# EAGLE board NEW IR (EAGLE 9.6.2)
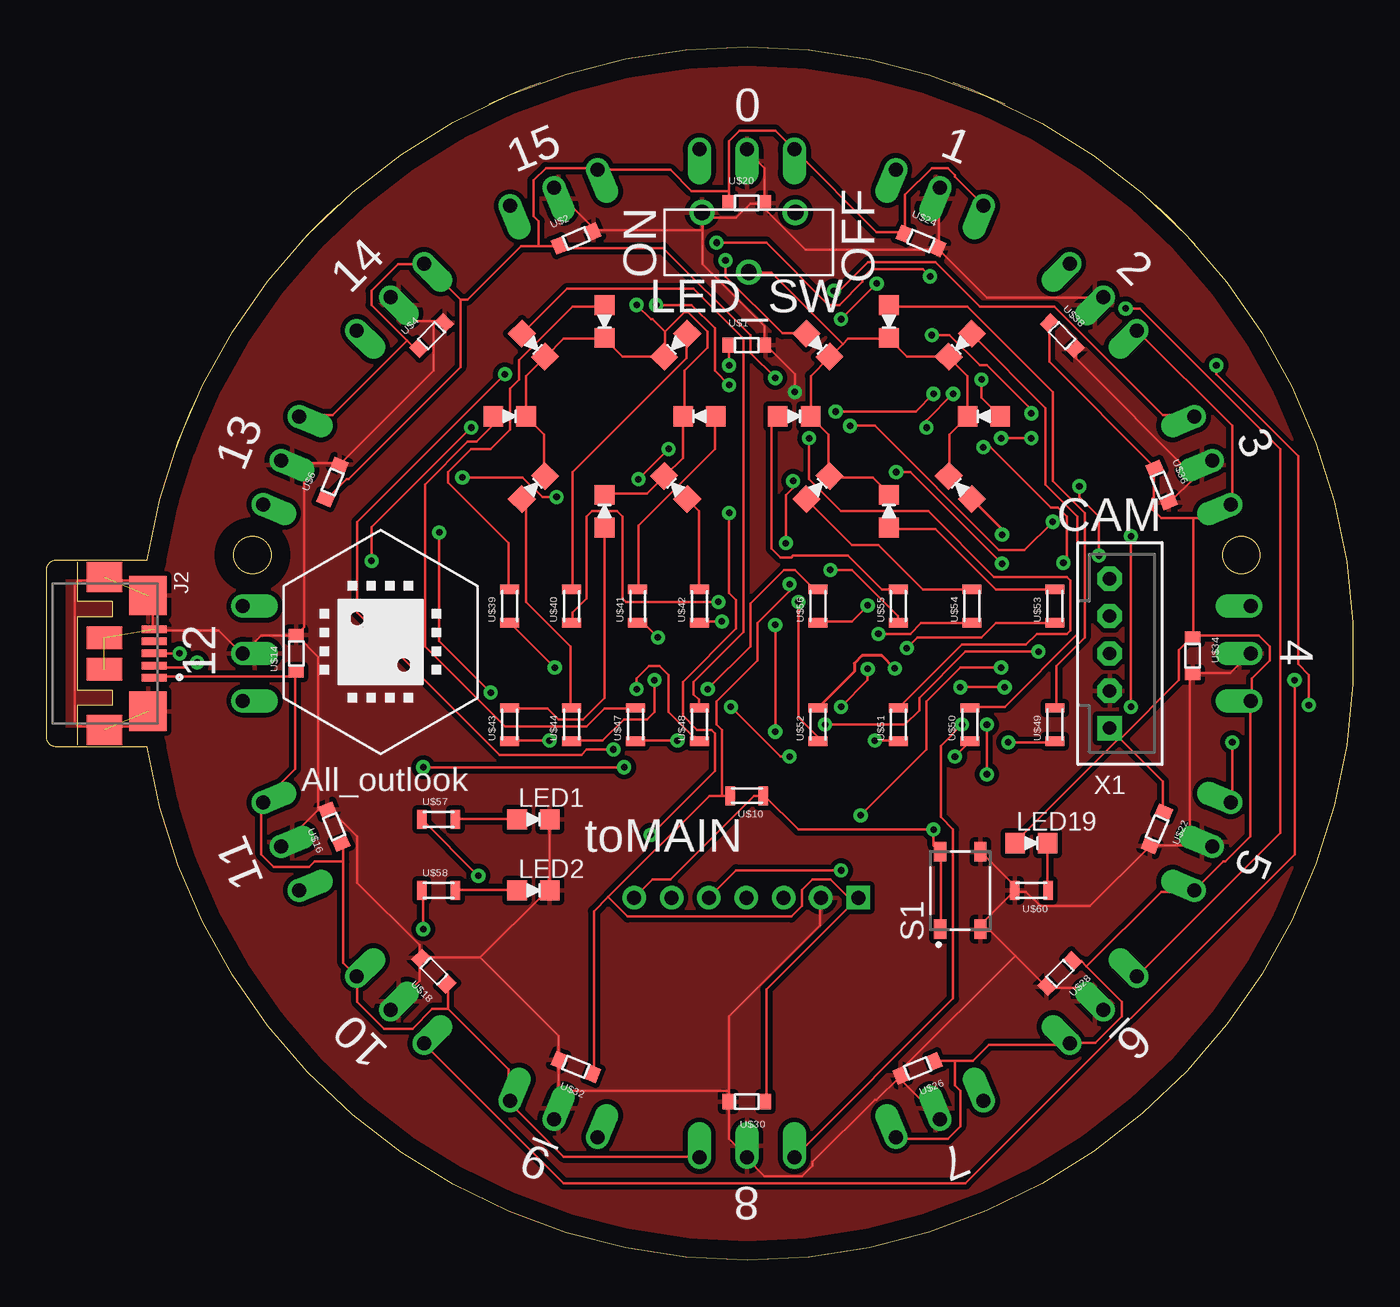
[diagram p0: board, top side]
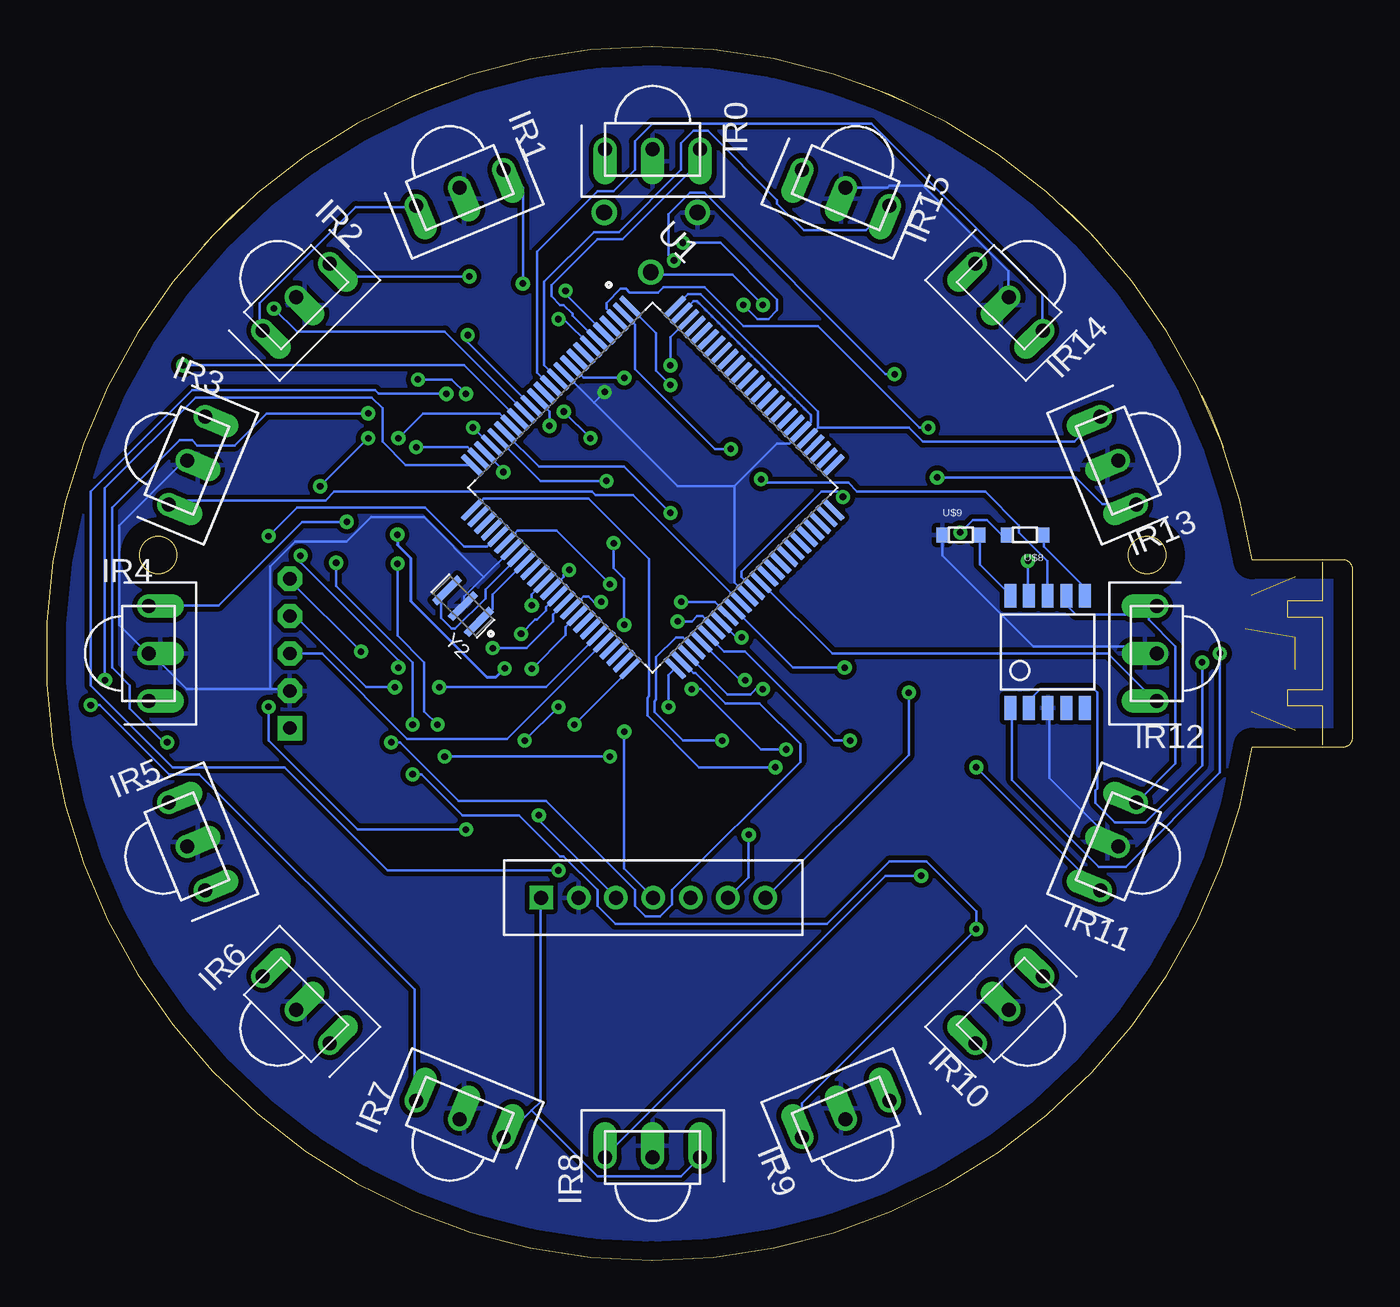
[diagram p1: board, bottom side, seen from below]

Size 69.96 x 65 mm. Coordinates in mm from the lower left corner, seen from the top.
Outline: 61.52,54.4 arc5 59.4,56.52
Outline: 51.31,61.92 arc5 48.54,63.07
Outline: 26.46,63.07 arc5 23.69,61.92
Outline: 15.6,56.52 arc5 13.48,54.4
Outline: 8.08,46.31 arc5 6.93,43.54
Outline: 5.39,37.5 arc-342 5.39,27.5 0.5,27.5 arc-90 0,28 0,37 arc-90 0.5,37.5 5.39,37.5
Outline: circle at 11.02,37.77 radius 1
Outline: circle at 63.98,37.77 radius 1
Copper layers (1*16): Top 0.035mm / dielectric 1.5mm / Bottom 0.035mm
Design rules "default *": minimum track width 5mil, minimum drill 0.35mm, track to track 8mil, track to pad 8mil, pad to pad 8mil, via to via 8mil, smd to smd 1mil, copper to edge 40mil, drill to drill 6mil, minimum pad ring 10mil, minimum via ring 8mil, stop-mask expansion 4mil, vias tented up to drill 0mil, thermal gap 10mil
Net classes: 0 default: width 0.127 mm, clearance 0.254 mm

## Footprints (pad centres in the part's own frame; a part is rotated, then mirrored left to right if it is on the bottom)
IR = drill 0.75 offset: P$1 -2.54,0; P$2 0,0; P$3 2.54,0
HRS_ZX62R-B-5P = smd 0.4 x 1.35: 1 1.3,2.675; 2 0.65,2.675; 3 0,2.675; 4 -0.65,2.675; 5 -1.3,2.675 | smd 2.1 x 2: S1 -3.1,2.35; S2 3.1,2.35 | smd 1.6 x 1.9: S3 -4.1,0; S4 4.1,0 | smd 1.2 x 1.9: S5 -0.85,0; S6 0.85,0
LED1608 = smd 1.05 x 1.08: A -0.875,0; K 0.875,0
SW_SKRPACE010 = smd 1.05 x 0.65: 1 -2.075,1.075; 2 2.075,1.075; 3 -2.075,-1.075; 4 2.075,-1.075
QFP50P1600X1600X120-100N = smd 1.47 x 0.28: 1 -7.67,6; 2 -7.67,5.5; 3 -7.67,5; 4 -7.67,4.5; 5 -7.67,4; 6 -7.67,3.5; 7 -7.67,3; 8 -7.67,2.5; 9 -7.67,2; 10 -7.67,1.5; 11 -7.67,1; 12 -7.67,0.5; 13 -7.67,0; 14 -7.67,-0.5; 15 -7.67,-1; 16 -7.67,-1.5; 17 -7.67,-2; 18 -7.67,-2.5; 19 -7.67,-3; 20 -7.67,-3.5; 21 -7.67,-4; 22 -7.67,-4.5; 23 -7.67,-5; 24 -7.67,-5.5; 25 -7.67,-6; 51 7.67,-6; 52 7.67,-5.5; 53 7.67,-5; 54 7.67,-4.5; 55 7.67,-4; 56 7.67,-3.5; 57 7.67,-3; 58 7.67,-2.5; 59 7.67,-2; 60 7.67,-1.5; 61 7.67,-1; 62 7.67,-0.5; 63 7.67,0; 64 7.67,0.5; 65 7.67,1; 66 7.67,1.5; 67 7.67,2; 68 7.67,2.5; 69 7.67,3; 70 7.67,3.5; 71 7.67,4; 72 7.67,4.5; 73 7.67,5; 74 7.67,5.5; 75 7.67,6 | smd 0.28 x 1.47: 26 -6,-7.67; 27 -5.5,-7.67; 28 -5,-7.67; 29 -4.5,-7.67; 30 -4,-7.67; 31 -3.5,-7.67; 32 -3,-7.67; 33 -2.5,-7.67; 34 -2,-7.67; 35 -1.5,-7.67; 36 -1,-7.67; 37 -0.5,-7.67; 38 0,-7.67; 39 0.5,-7.67; 40 1,-7.67; 41 1.5,-7.67; 42 2,-7.67; 43 2.5,-7.67; 44 3,-7.67; 45 3.5,-7.67; 46 4,-7.67; 47 4.5,-7.67; 48 5,-7.67; 49 5.5,-7.67; 50 6,-7.67; 76 6,7.67; 77 5.5,7.67; 78 5,7.67; 79 4.5,7.67; 80 4,7.67; 81 3.5,7.67; 82 3,7.67; 83 2.5,7.67; 84 2,7.67; 85 1.5,7.67; 86 1,7.67; 87 0.5,7.67; 88 0,7.67; 89 -0.5,7.67; 90 -1,7.67; 91 -1.5,7.67; 92 -2,7.67; 93 -2.5,7.67; 94 -3,7.67; 95 -3.5,7.67; 96 -4,7.67; 97 -4.5,7.67; 98 -5,7.67; 99 -5.5,7.67; 100 -6,7.67
CON = smd 0.6 x 0.813: P$1 -1,0; P$2 1,0
SSW = drill 0.85: P$1 -2.5,1.6; P$2 2.5,1.6; P$3 0,-1.6
CH340K = smd 0.635 x 1.27: P$1 0.5,-1; P$2 1.5,-1; P$3 2.5,-1; P$4 3.5,-1; P$5 4.5,-1; P$6 4.5,5; P$7 3.5,5; P$8 2.5,5; P$9 1.5,5; P$10 0.5,5
1608 = smd 0.508 x 1.016: P$1 -0.889,0; P$2 0.889,0
SPI = drill 0.75 square: P$1 0,0 | drill 0.75: P$2 2,0; P$3 4,0; P$4 6,0; P$5 8,0; P$6 10,0; P$7 12,0
B5B-PH-K-S = drill 0.7 pad 1.3 square: 1 4,0 | drill 0.7 pad 1.3 octagon: 2 2,0; 3 0,0; 4 -2,0; 5 -4,0
OSC_CSTCE16M0V53-R0 = smd 0.4 x 1.9: 1 -1.2,0; 2 0,0; 3 1.2,0

## Placement (x,y rotation side)
IR0  IR  [IR]  37.5,59.5 180 bottom
IR1  IR  [IR]  47.83,57.44 202.5 bottom
IR2  IR  [IR]  56.59,51.59 225 bottom
IR3  IR  [IR]  62.44,42.83 247.5 bottom
IR4  IR  [IR]  64.5,32.5 270 bottom
IR5  IR  [IR]  62.44,22.17 292.5 bottom
IR6  IR  [IR]  56.59,13.41 315 bottom
IR7  IR  [IR]  47.83,7.55 337.5 bottom
IR8  IR  [IR]  37.5,5.5 0 bottom
IR9  IR  [IR]  27.17,7.55 22.5 bottom
IR10  IR  [IR]  18.41,13.41 45 bottom
IR11  IR  [IR]  12.56,22.17 67.5 bottom
IR12  IR  [IR]  10.5,32.5 90 bottom
IR13  IR  [IR]  12.56,42.83 112.5 bottom
IR14  IR  [IR]  18.41,51.59 135 bottom
IR15  IR  [IR]  27.17,57.44 157.5 bottom
J2  ZX62R-B-5P  [HRS_ZX62R-B-5P]  3.08,32.5 270 top
LED1  LED1608  [LED1608]  26.07,23.61 0 top
LED2  LED1608  [LED1608]  26.07,19.8 0 top
LED3  LED1608  [LED1608]  29.88,50.28 270 top
LED4  LED1608  [LED1608]  33.69,49.01 225 top
LED5  LED1608  [LED1608]  34.96,45.2 180 top
LED6  LED1608  [LED1608]  33.69,41.39 135 top
LED7  LED1608  [LED1608]  29.88,40.12 90 top
LED8  LED1608  [LED1608]  26.07,41.39 45 top
LED9  LED1608  [LED1608]  24.8,45.2 0 top
LED10  LED1608  [LED1608]  26.07,49.01 315 top
LED11  LED1608  [LED1608]  45.12,50.28 270 top
LED12  LED1608  [LED1608]  48.93,49.01 225 top
LED13  LED1608  [LED1608]  50.2,45.2 180 top
LED14  LED1608  [LED1608]  48.93,41.39 135 top
LED15  LED1608  [LED1608]  45.12,40.12 90 top
LED16  LED1608  [LED1608]  41.31,41.39 45 top
LED17  LED1608  [LED1608]  40.04,45.2 0 top
LED18  LED1608  [LED1608]  41.31,49.01 315 top
LED19  LED1608  [LED1608]  52.74,22.34 0 top
S1  SKRPACE010  [SW_SKRPACE010]  48.93,19.8 90 top
U1  ATMEGA2560-16AU  [QFP50P1600X1600X120-100N]  37.5,41.39 315 bottom
U$1  1608  [CON]  37.5,49.01 0 top
U$2  1608  [CON]  28.36,54.72 22.5 top
U$3  ALL  [ALL]  17.88,33.12 0 top
U$4  1608  [CON]  20.61,49.52 45 top
U$5  SSW  [SSW]  37.6,54.52 0 top
U$6  1608  [CON]  15.31,41.68 67.5 top
U$7  CH340K  [CH340K]  18.84,30.58 0 bottom
U$8  1608  [CON]  17.56,38.85 180 bottom
U$9  1608  [CON]  20.99,38.85 0 bottom
U$10  R  [1608]  37.5,24.88 180 top
U$14  1608  [CON]  13.37,32.5 90 top
U$16  1608  [CON]  15.4,23.23 112.5 top
U$18  1608  [CON]  20.74,15.48 135 top
U$20  1608  [CON]  37.5,56.63 0 top
U$22  1608  [CON]  59.47,23.1 247.5 top
U$24  1608  [CON]  46.82,54.6 337.5 top
U$26  1608  [CON]  46.64,10.27 202.5 top
U$28  1608  [CON]  54.26,15.35 225 top
U$30  1608  [CON]  37.5,8.5 180 top
U$32  1608  [CON]  28.35,10.35 157.5 top
U$34  1608  [CON]  61.38,32.37 270 top
U$36  1608  [CON]  59.73,41.52 292.5 top
U$38  1608  [CON]  54.39,49.52 315 top
U$39  R  [1608]  24.8,35.04 90 top
U$40  R  [1608]  28.1,35.04 90 top
U$41  R  [1608]  31.66,35.04 90 top
U$42  R  [1608]  34.96,35.04 90 top
U$43  R  [1608]  24.8,28.69 90 top
U$44  R  [1608]  28.1,28.69 90 top
U$47  R  [1608]  31.53,28.69 90 top
U$48  R  [1608]  34.96,28.69 90 top
U$49  R  [1608]  54.01,28.69 90 top
U$50  R  [1608]  49.44,28.69 90 top
U$51  R  [1608]  45.63,28.69 90 top
U$52  R  [1608]  41.31,28.69 90 top
U$53  R  [1608]  54.01,35.04 90 top
U$54  R  [1608]  49.56,35.04 90 top
U$55  R  [1608]  45.63,35.04 90 top
U$56  R  [1608]  41.31,35.04 90 top
U$57  R  [1608]  20.99,23.61 0 top
U$58  R  [1608]  20.99,19.8 0 top
U$59  SPI  [SPI]  43.47,19.42 0 bottom
U$60  R  [1608]  52.74,19.8 180 top
X1  B5B-PH-K-S  [B5B-PH-K-S]  56.93,32.5 270 top
Y2  CSTCE16M0V53-R0  [OSC_CSTCE16M0V53-R0]  47.66,35.04 135 bottom

## Library data of the parts
IR0 IR1-IR15 = IR
J2 = USBMicro; AVAILABILITY: In Stock; DESCRIPTION: USB - micro B USB 2.0 Receptacle Connector 5 Position Surface Mount, Right Angle; MF: Hirose; MP: ZX62R-B-5P; PACKAGE: None; PRICE: None
LED1-LED19 = generic
S1 = SKRPACE010; AVAILABILITY: In Stock; DESCRIPTION: Switch Tactile N.O. SPST Button J-Bend 0.05A 16VDC 2.55N SMD Automotive T/R; MF: ALPS; MP: SKRPACE010; PACKAGE: None; PRICE: None
U1 = ATMEGA2560-16AU (1); AVAILABILITY: In Stock; DESCRIPTION: AVR AVR® ATmega Microcontroller IC 8-Bit 16MHz 256KB (128K x 16) FLASH 100-TQFP (14x14); MF: Microchip Technology; MP: ATMEGA2560-16AU; PACKAGE: None; PRICE: None; PURCHASE-URL: https://pricing.snapeda.com/search/part/ATMEGA2560-16AU/?ref=eda
U$1 U$2 U$4 U$6 U$8 U$9 U$14 U$16 U$18 U$20 U$22 U$24 U$26 U$28 U$30 U$32 U$34 U$36 U$38 = con1608
U$3 = All_outlook
U$5 = SSW
U$7 = CH340K
U$10 U$39-U$44 U$47-U$58 U$60 = R 1608
U$59 = SPI用PH7ピン
X1 = con-JST PH
Y2 = CSTCE16M0V53-R0; MANUFACTURER: Murata; MAXIMUM_PACKAGE_HEIGHT: 1.00mm; PARTREV: May 7, 2019; STANDARD: Manufacturer Recommendations

## Nets
+5V: IR0.P$3 IR1.P$3 IR2.P$3 IR3.P$3 IR4.P$3 IR5.P$3 IR6.P$3 IR7.P$3 IR8.P$3 IR9.P$3 IR10.P$3 IR11.P$3 IR12.P$3 IR13.P$3 IR14.P$3 IR15.P$3 J2.1 LED19.A U1.10 U1.31 U1.61 U1.80 U1.100 U$2.P$1 U$4.P$1 U$6.P$1 U$7.P$7 U$10.P$2 U$14.P$1 U$16.P$1 U$18.P$1 U$20.P$1 U$22.P$1 U$24.P$1 U$26.P$1 U$28.P$1 U$30.P$1 U$32.P$1 U$34.P$1 U$36.P$1 U$38.P$1 U$59.P$1 X1.1
A0: U1.97
A1: U1.96
A2: U1.95
A3: U1.94
A4: U1.93
A5: U1.92
A6: U1.91
A7: U1.90
A8: U1.89
A9: U1.88
A10: U1.87
A11: U1.86
A12: U1.85
A13: U1.84
A14: U1.83
A15: U1.82
D2: IR0.P$1 U1.6
D3: IR1.P$1 U1.7
D4: IR2.P$1 U1.1
D5: IR3.P$1 U1.5
D6: IR4.P$1 U1.15
D7: IR5.P$1 U1.16
D8: IR6.P$1 U1.17
D9: IR7.P$1 U1.18
D10: IR8.P$1 U1.23 U$57.P$1
D11: IR9.P$1 U1.24 U$58.P$1
D12: IR10.P$1 U1.25
D13: IR11.P$1 U1.26
D14: IR12.P$1 U1.64
D15: IR13.P$1 U1.63
D16: IR14.P$1 U1.13
D17: IR15.P$1 U1.12
D22: U1.78
D23: U1.77
D24: U1.76
D25: U1.75
D26: U1.74
D27: U1.73
D28: U1.72
D29: U1.71
D30: U1.60 U$39.P$1
D31: U1.59 U$40.P$1
D32: U1.58 U$41.P$1
D33: U1.57 U$42.P$1
D34: U1.56 U$43.P$1
D35: U1.55 U$44.P$1
D36: U1.54 U$47.P$1
D37: U1.53 U$48.P$1
D39: U1.70
D40: U1.52 U$49.P$1
D41: U1.51 U$50.P$1
D42: U1.42 U$51.P$1
D43: U1.41 U$52.P$1
D44: U1.40 U$53.P$1
D45: U1.39 U$54.P$1
D46: U1.38 U$55.P$1
D47: U1.37 U$56.P$1
D48: U1.36
D49: U1.35
GND: IR0.P$2 IR1.P$2 IR2.P$2 IR3.P$2 IR4.P$2 IR5.P$2 IR6.P$2 IR7.P$2 IR8.P$2 IR9.P$2 IR10.P$2 IR11.P$2 IR12.P$2 IR13.P$2 IR14.P$2 IR15.P$2 J2.5 J2.S1 J2.S2 J2.S3 J2.S4 J2.S5 J2.S6 LED1.K LED2.K S1.3 S1.4 U1.11 U1.32 U1.62 U1.81 U1.99 U$1.P$2 U$2.P$2 U$4.P$2 U$5.P$1 U$6.P$2 U$7.P$3 U$9.P$1 U$14.P$2 U$16.P$2 U$18.P$2 U$20.P$2 U$22.P$2 U$24.P$2 U$26.P$2 U$28.P$2 U$30.P$2 U$32.P$2 U$34.P$2 U$36.P$2 U$38.P$2 U$59.P$2 U$60.P$2 X1.2 Y2.2
MISO: U1.22 U$59.P$5
MOSI: U1.21 U$59.P$4
N$1: LED3.A U$39.P$2
N$2: LED4.A U$40.P$2
N$3: LED5.A U$41.P$2
N$4: LED6.A U$42.P$2
N$5: LED7.A U$43.P$2
N$6: LED8.A U$44.P$2
N$7: LED9.A U$47.P$2
N$9: LED2.A U$58.P$2
N$10: LED1.A U$57.P$2
N$11: LED3.K LED4.K LED5.K LED6.K LED7.K LED8.K LED9.K LED10.K LED11.K LED12.K LED13.K LED14.K LED15.K LED16.K LED17.K LED18.K U$5.P$3
N$12: U$7.P$6 U$8.P$1
N$16: J2.2 U$7.P$2
N$17: J2.3 U$7.P$1
N$18: U$7.P$10 U$9.P$2
N$22: LED10.A U$48.P$2
N$24: LED11.A U$49.P$2
N$25: LED12.A U$50.P$2
N$26: LED13.A U$51.P$2
N$27: LED14.A U$52.P$2
N$28: LED15.A U$53.P$2
N$29: LED16.A U$54.P$2
N$30: LED17.A U$55.P$2
N$31: LED18.A U$56.P$2
N$37: LED19.K U$60.P$1
N$46: U1.98 U$1.P$1
RES: S1.1 S1.2 U1.30 U$8.P$2 U$10.P$1 U$59.P$7
RST: U1.50 X1.5
RX0: U1.2 U$7.P$8
RX1: U1.45 X1.4
SCK [New Class]: U1.20 U$59.P$6
SCL: U1.43
SDA: U1.44
SS: U1.19 U$59.P$3
TX0: U1.3 U$7.P$9
TX1: U1.46 X1.3
XT1: U1.34 Y2.1
XT2: U1.33 Y2.3

## Tracks (layer width: path | path; a pad name or v marks a point on that pad's centre or on a via)
+5V  (via drill 0.35)
  Top 0.127: 30.07,19.45 35.5,24.88 36.17,24.88 | 30.07,19.45 29.31,18.69 29.31,10.02 U$32.P$1 | U$10.P$2 36.17,24.88 | v39.79,36.21 39.79,35.83 38.07,34.12 38.07,32.12 35.88,29.93 35.88,28.69 36.17,28.4 36.17,24.88 | 43.22,19.16 U$59.P$1 43.41,19.35 | 43.22,19.16 38.55,14.5 38.55,8.5 U$30.P$1 | 48.64,10.69 49.6,10.69 50.45,11.54 54.74,11.54 IR6.P$3 54.84,11.64 56.17,11.64 57.6,13.07 57.6,13.83 55.69,15.74 | 48.64,10.69 47.6,10.69 U$26.P$1 | 55.69,15.74 55.41,16.02 55.03,16.02 U$28.P$1 | 48.64,10.69 48.64,9.35 48.93,9.07 48.93,7.16 48.26,6.5 45.5,6.5 IR7.P$3 | 55.69,15.74 59.69,19.74 61.41,19.74 IR5.P$3 61.5,19.83 63.03,21.36 63.12,21.36 64.46,22.69 64.46,29.93 IR4.P$3 64.55,30.02 64.55,31.17 65.5,32.12 65.5,32.88 64.93,33.45 61.41,33.45 | 13.31,31.26 13.31,26.31 11.59,24.59 IR11.P$3 11.5,24.5 11.5,21.74 12.16,21.07 14.07,21.07 14.35,21.36 15.88,21.36 | 13.31,31.26 13.31,31.45 U$14.P$1 13.31,31.26 | 13.31,31.26 5.78,31.26 J2.1 | 15.88,21.36 15.88,15.93 16.55,15.26 IR10.P$3 16.64,15.16 16.64,13.83 18.07,12.4 19.59,12.4 20.64,13.45 21.5,13.45 | 15.88,21.36 15.88,22.21 U$16.P$1 | 21.5,13.45 21.5,14.69 U$18.P$1 | 21.5,13.45 24.74,10.21 24.74,8.59 IR9.P$3 24.74,8.5 27.69,5.54 34.93,5.54 IR8.P$3 | 30.07,19.45 31.12,18.4 39.88,18.4 40.45,18.97 40.45,19.83 41.02,20.4 41.98,20.4 43.22,19.16 | 36.55,57.26 36.55,59.93 37.12,60.5 39.02,60.5 39.98,59.55 IR0.P$3 40.07,59.46 44.45,55.07 45.88,55.07 U$24.P$1 45.98,55.07 45.98,57.07 47.41,58.5 48.26,58.5 48.64,58.12 48.64,58.03 50.17,56.5 IR1.P$3 | 36.55,57.26 36.55,56.69 U$20.P$1 | 36.55,57.26 34.55,57.26 33.4,58.41 29.59,58.41 IR15.P$3 29.5,58.5 26.74,58.5 26.07,57.84 26.07,55.93 26.36,55.65 26.36,54.31
  Top 0.127: 22.16,51.45 22.16,47.83 16.16,41.83 16.07,41.83 15.02,40.79 U$6.P$1 | 22.16,51.45 20.26,53.36 IR14.P$3 20.16,53.36 18.83,53.36 17.4,51.93 17.4,51.17 19.31,49.26 | 19.31,49.26 19.69,48.88 19.88,48.88 U$4.P$1 | 26.36,54.31 25.4,54.31 22.55,51.45 22.16,51.45 | 26.36,54.31 27.4,54.31 U$2.P$1 27.5,54.31 27.59,54.22 33.02,54.22 37.69,49.55 37.69,48.6 v39.02,47.26 | 19.31,49.26 15.31,45.26 13.59,45.26 IR13.P$3 | X1.1 57.41,28.02 | 57.41,28.02 57.5,27.93 | 57.5,27.93 59.79,25.64 59.79,24.12 U$22.P$1 | X1.1 | 57.41,28.02 57.41,27.93 51.88,22.4 LED19.A | 57.41,28.02 X1.1 | 61.41,39.74 62.74,39.74 63.41,40.41 IR3.P$3 63.5,40.5 63.5,44.69 58.45,49.74 IR2.P$3 | 61.41,39.74 59.69,39.74 59.22,40.21 59.22,40.79 59.31,40.88 59.31,42.41 U$36.P$1 59.31,42.5 53.69,48.12 53.69,50.22 U$38.P$1 | 61.41,39.74 61.41,33.45 | 61.41,33.45 U$34.P$1 61.31,33.36 60.65,32.69 60.65,31.07 57.5,27.93 | 57.5,27.93 X1.1
  Bottom 0.127: v39.79,36.21 42.64,39.07 44.74,39.07 45.31,38.5 U1.31 | 43.98,8.02 45.41,6.59 IR7.P$3 | 43.98,8.02 43.5,8.5 43.5,19.35 U$59.P$1 | 10.93,34.59 14.83,34.59 15.31,35.07 15.31,35.55 U$7.P$7 | 10.93,34.59 10.54,34.98 IR12.P$3 10.93,34.59 | 10.93,34.59 10.93,34.31 9.5,32.88 9.5,26.59 11.5,24.59 IR11.P$3 | 43.98,8.02 40.45,4.5 35.98,4.5 35.02,5.45 IR8.P$3 | 28.64,44.6 29.21,44.02 U1.80 | 28.64,44.6 28.64,45.45 34.93,51.74 35.59,51.74 36.26,51.07 U1.100 | v39.02,47.26 41.22,47.26 41.79,47.83 U1.10 | 28.64,44.6 23.78,44.6 23.02,43.83 14.93,43.83 13.59,45.17 IR13.P$3 | U1.61 32.83,35.26 38.55,40.98 40.55,40.98 40.74,41.17 54.55,41.17 55.03,40.69 63.22,40.69 63.41,40.5 IR3.P$3 | IR1.P$3 50.26,56.41 53.41,56.41 58.55,51.26 58.55,49.93 58.45,49.83 IR2.P$3
D2
  Bottom 0.127: U1.6 40.45,49.26 41.79,50.6 41.79,50.69 42.26,51.17 42.45,51.17 42.93,51.64 42.93,52.22 40.45,54.69 39.12,54.69 35.02,58.79 35.02,59.46 IR0.P$1
D3  (via drill 0.35)
  Top 0.127: v44.45,52.31 v42.55,50.41
  Bottom 0.127: v42.55,50.41 42.26,50.41 40.83,48.98 U1.7 | v44.45,52.31 44.45,57.46 45.41,58.41 IR1.P$1
D4  (via drill 0.35)
  Top 0.127: v36.55,46.88 35.79,47.64 35.79,49.93 34.55,51.17 v32.64,51.17 | v35.88,54.5 38.55,54.5 41.88,51.17 42.45,51.17 43.69,52.41 43.69,52.6 44.17,53.07 46.93,53.07 v47.31,52.69
  Bottom 0.127: v36.55,46.88 37.31,47.64 37.31,49.64 38.64,50.98 U1.1 | v32.64,51.17 31.88,50.41 31.31,50.41 30.83,50.88 30.83,51.45 33.88,54.5 v35.88,54.5 | v47.31,52.69 54.07,52.69 54.74,53.36 IR2.P$1
D5  (via drill 0.35)
  Top 0.127: v42.17,51.93 42.45,51.93 43.98,53.45 47.6,53.45 49.98,51.07 53.98,51.07 59.79,45.26 61.41,45.26 IR3.P$1
  Bottom 0.127: v42.17,51.93 42.17,51.74 40.07,49.64 U1.5
D6  (via drill 0.35)
  Top 0.127: v43.02,44.69 44.36,44.69 51.01,38.04 52.37,38.04 v53.88,39.55
  Bottom 0.127: v43.02,44.69 43.02,45.45 43.6,46.02 U1.15 | v53.88,39.55 56.26,39.55 60.74,35.07 64.46,35.07 IR4.P$1
D7  (via drill 0.35)
  Top 0.127: v47.41,49.55 48.36,49.55 49.98,47.93 50.36,47.93 52.74,45.55 v52.74,45.36 | v63.5,27.74 63.5,24.59 IR5.P$1
  Bottom 0.127: v47.41,49.55 47.41,49.17 44.07,45.83 U1.16 | v52.74,45.36 58.17,45.36 59.88,43.64 61.88,43.64 62.17,43.93 62.84,43.93 66.46,40.31 66.46,31.74 65.5,30.79 65.5,29.55 63.69,27.74 v63.5,27.74
D8  (via drill 0.35)
  Top 0.127: v57.79,50.98 58.55,50.98 66.08,43.45 66.08,22.88 58.45,15.26 IR6.P$1
  Bottom 0.127: v57.79,50.98 56.55,49.74 48.64,49.74 44.36,45.45 U1.17
D9  (via drill 0.35)
  Top 0.127: v62.65,47.93 62.65,47.45 67.03,43.07 67.03,31.93 67.6,31.36 v67.6,29.74
  Bottom 0.127: v62.65,47.93 47.6,47.93 44.74,45.07 U1.18 | v67.6,29.74 67.12,29.74 63.41,26.02 61.79,26.02 50.26,14.5 50.26,8.59 IR7.P$1
D10  (via drill 0.35)
  Top 0.127: v23.12,20.59 U$57.P$1 | v45.5,42.22 46.26,42.22 v51.16,37.31 | v49.02,28.69 47.88,27.55 47.88,23.74 48.55,23.07 48.55,14.02 40.07,5.54 IR8.P$1
  Bottom 0.127: v23.12,20.59 25.02,20.59 40.07,5.54 IR8.P$1 | v45.5,42.22 45.5,42.31 46.45,43.26 U1.23 | v51.16,37.31 51.16,33.46 49.73,32.02 49.73,29.39 v49.02,28.69
D11  (via drill 0.35)
  Top 0.127: v20.16,17.74 20.16,19.74 U$58.P$1 | v50.17,43.55 50.55,43.55 53.79,40.31 54.17,40.31 54.64,39.83 54.64,37.55 v54.45,37.36 | v50.36,26.02 v50.36,28.69
  Bottom 0.127: IR9.P$1 29.5,6.59 29.5,8.4 v20.16,17.74 20.16,18.69 22.83,21.36 24.83,21.36 28.16,18.02 39.5,18.02 40.45,18.97 40.45,19.83 42.26,21.64 42.45,21.64 44.64,23.83 47.69,23.83 49.88,26.02 v50.36,26.02 | v50.17,43.55 47.41,43.55 46.84,42.98 U1.24 | v54.45,37.36 54.45,36.12 50.36,32.02 v50.36,28.69
D12  (via drill 0.35)
  Top 0.127: v66.84,31.07 66.84,21.74 49.22,4.12 27.69,4.12 20.26,11.54 IR10.P$1
  Bottom 0.127: v66.84,31.07 66.84,41.36 61.98,46.22 52.55,46.22 51.98,45.64 51.98,43.83 50.74,42.6 47.22,42.6 U1.25
D13  (via drill 0.35)
  Top 0.127: v20.16,26.4 v30.93,26.4
  Bottom 0.127: v30.93,26.4 35.02,26.4 37.79,29.17 37.79,30.12 37.69,30.21 37.69,37.55 40.93,40.79 46.55,40.79 47.12,40.21 U1.26 | v20.16,26.4 13.59,19.83 IR11.P$1
D14
  Bottom 0.127: U1.64 31.69,36.31 27.88,32.5 13.12,32.5 10.54,29.93 IR12.P$1
D15  (via drill 0.35)
  Top 0.127: v27.31,40.88 26.55,40.88 25.5,41.93 v22.26,41.93
  Bottom 0.127: v27.31,40.88 27.59,41.17 28.45,41.17 32.74,36.88 32.74,36.6 32.17,36.02 U1.63 | v22.26,41.93 14.83,41.93 13.4,40.5 11.59,40.5 IR13.P$1
D16
  Bottom 0.127: U1.13 42.93,46.79 43.69,47.55 43.69,54.03 40.45,57.26 39.59,57.26 38.45,58.41 38.45,59.93 37.5,60.88 25.78,60.88 16.64,51.74 16.64,49.83 IR14.P$1
D17
  Bottom 0.127: U1.12 42.55,47.17 43.31,47.93 43.31,52.41 40.64,55.07 39.31,55.07 35.98,58.41 35.98,59.84 35.31,60.5 34.55,60.5 30.83,56.79 30.83,56.6 29.4,55.17 26.07,55.17 24.83,56.41 IR15.P$1
D30  (via drill 0.35)
  Top 0.127: v27.21,31.74 U$39.P$1
  Bottom 0.127: v27.21,31.74 29.98,31.74 33.12,34.88 U1.60
D31  (via drill 0.35)
  Top 0.127: v35.98,35.26 31.02,35.26 30.83,35.45 30.83,39.83 30.55,40.12 29.21,40.12 28.93,39.83 28.93,35.45 28.16,34.69 28.16,34.21 U$40.P$1
  Bottom 0.127: v35.98,35.26 34.17,35.26 33.5,34.59 U1.59
D32  (via drill 0.35)
  Top 0.127: v32.74,33.36 31.98,34.12 31.69,34.12 U$41.P$1
  Bottom 0.127: v32.74,33.36 33.02,33.36 33.78,34.12 U1.58
D33  (via drill 0.35)
  Top 0.127: v36.17,34.21 35.02,34.21 U$42.P$1
  Bottom 0.127: v36.17,34.21 35.41,34.21 35.12,34.5 34.83,34.5 34.26,33.93 U1.57
D34  (via drill 0.35)
  Top 0.127: v26.93,27.83 24.83,27.83 U$43.P$1
  Bottom 0.127: v26.93,27.83 27.78,27.83 32.55,32.59 33.69,32.59 34.55,33.45 U1.56
D35  (via drill 0.35)
  Top 0.127: v32.55,31.07 32.55,29.36 32.17,28.98 30.93,28.98 29.79,27.83 28.16,27.83 U$44.P$1
  Bottom 0.127: v32.55,31.07 32.83,31.07 34.83,33.07 U1.55
D36  (via drill 0.35)
  Top 0.127: v33.78,27.83 31.59,27.83 U$47.P$1
  Bottom 0.127: v33.78,27.83 35.88,27.83 37.41,29.36 37.41,29.93 37.31,30.02 37.31,32.31 36.26,33.36 35.88,33.36 35.31,32.79 U1.54
D37  (via drill 0.35)
  Top 0.127: U$48.P$1 34.74,28.02 34.64,28.02 33.31,29.36 33.31,31.36 32.83,31.83 32.26,31.83 31.59,31.17 v31.59,30.59
  Bottom 0.127: v31.59,30.59 31.98,30.59 32.26,30.31 33.5,30.31 35.59,32.4 U1.53
D40  (via drill 0.35)
  Top 0.127: v51.5,27.74 53.98,27.74 U$49.P$1
  Bottom 0.127: v51.5,27.74 51.02,27.74 47.88,24.59 43.22,24.59 38.45,19.83 38.45,18.97 37.88,18.4 37.12,18.4 36.45,19.07 36.45,19.83 29.59,26.69 29.59,27.64 31.79,29.83 33.59,29.83 35.21,31.45 35.31,31.45 35.88,32.02 U1.52
D41  (via drill 0.35)
  Top 0.127: v48.64,26.98 49.41,27.74 U$50.P$1 | v39.79,26.98 39.31,26.98 v36.64,29.64
  Bottom 0.127: v39.79,26.98 v48.64,26.98 | v36.64,29.64 36.64,31.36 36.36,31.64 U1.51
D42  (via drill 0.35)
  Top 0.127: v44.36,27.83 45.6,27.83 U$51.P$1 | v43.97,31.67 43.97,31.06 v42.55,29.64
  Bottom 0.127: v42.55,29.64 v44.36,27.83 | v43.97,31.67 42.17,33.48 42.17,33.93 41.6,34.5 U1.42
D43  (via drill 0.35)
  Top 0.127: U$52.P$1 41.31,28.02 40.26,29.07 v40.26,35.26
  Bottom 0.127: v40.26,35.26 40.64,35.26 40.93,35.55 41.22,35.55 41.79,34.98 U1.41
D44  (via drill 0.35)
  Top 0.127: v46.07,32.79 46.64,33.36 50.07,33.36 50.84,34.12 53.98,34.12 U$53.P$1
  Bottom 0.127: v46.07,32.79 44.26,32.79 42.83,34.21 42.83,34.59 42.26,35.17 U1.40
D45  (via drill 0.35)
  Top 0.127: v44.55,33.55 46.26,33.55 46.84,34.12 49.5,34.12 U$54.P$1
  Bottom 0.127: v44.55,33.55 43.79,34.31 43.69,34.31 43.22,34.79 43.22,34.98 42.64,35.55 U1.39
D46  (via drill 0.35)
  Top 0.127: v41.98,36.98 43.12,36.98 45.6,34.5 45.6,34.21 U$55.P$1
  Bottom 0.127: v41.98,36.98 42.26,36.69 42.26,36.6 42.83,36.02 U1.38
D47  (via drill 0.35)
  Top 0.127: v43.98,35.07 43.12,34.21 41.31,34.21 U$56.P$1
  Bottom 0.127: v43.98,35.07 43.98,35.64 43.31,36.31 U1.37
GND  (via drill 0.35)  (4 unrouted)
  Top 0.127: U$26.P$2 45.79,9.83 45.79,9.64 47.79,7.64 IR7.P$2 | U$60.P$2 51.79,19.83 51.79,20.12 50.07,21.83 S1.4 | U$60.P$2 50.07,18.02 50.07,17.74 S1.3 50.07,17.64 50.55,17.64 51.88,16.31 | IR6.P$2 55.41,14.59 53.6,14.59 U$28.P$2 53.5,14.69 51.88,16.31 | 51.88,16.31 45.79,10.21 45.79,9.93 U$26.P$2 | 61.5,41.93 62.36,42.79 IR3.P$2 61.5,41.93 | 61.5,41.93 60.17,40.6 U$36.P$2 | 61.5,41.93 55.12,48.31 55.12,48.79 U$38.P$2 | 61.22,22.21 62.36,22.21 IR5.P$2 61.22,22.21 | 61.22,22.21 59.12,22.21 U$22.P$2 59.03,22.12 55.88,18.97 53.22,18.97 52.45,19.74 51.88,19.74 U$60.P$2 | IR4.P$2 64.46,32.5 63.41,31.45 61.41,31.45 U$34.P$2 61.31,31.36 61.22,31.26 61.22,22.21 | U$24.P$2 47.79,54.22 47.79,57.36 IR1.P$2 | IR2.P$2 56.55,51.55 50.36,51.55 47.79,54.12 U$24.P$2 | IR15.P$2 27.21,57.36 29.21,55.36 29.21,55.17 U$2.P$2 29.31,55.17 35.12,55.17 | U$20.P$2 38.45,56.69 38.45,58.5 37.5,59.46 IR0.P$2 | 35.12,55.84 35.12,56.03 U$5.P$1 35.12,55.84 | 35.12,55.84 35.12,55.17 | 35.12,55.17 35.12,53.36 38.45,50.03 38.45,49.07 U$1.P$2 38.55,48.98 40.07,47.45 v40.07,46.5 | 35.12,55.84 36.93,55.84 37.69,56.6 38.45,56.6 U$20.P$2 | U$24.P$2 47.69,54.12 40.64,54.12 38.55,56.22 38.55,56.6 U$20.P$2 | 36.55,8.5 36.55,6.5 37.5,5.54 IR8.P$2 37.5,5.45 38.45,4.5 40.45,4.5 41.02,5.07 41.02,5.26 44.36,8.59 44.45,8.59 45.69,9.83 U$26.P$2 | 36.55,8.5 36.55,9.07 | 36.55,9.07 36.55,13.07 41.41,17.93 41.41,19.35 U$59.P$2 | 36.55,8.5 U$30.P$2 | 27.4,9.07 27.4,7.83 27.21,7.64 IR9.P$2 27.4,9.07 | 27.4,9.07 27.4,10.69 U$32.P$2 27.4,10.78 27.4,12.02 23.21,16.21 | LED1.K 26.93,23.55 26.93,19.83 LED2.K 26.93,19.74 26.74,19.74 23.21,16.21
  Top 0.127: IR10.P$2 19.97,14.97 19.97,16.12 U$18.P$2 | 23.21,16.21 20.07,16.21 U$18.P$2 | 27.4,9.07 36.55,9.07 | 20.74,50.31 19.69,50.31 IR14.P$2 | 20.74,50.31 21.31,50.31 U$4.P$2 | 13.78,42.69 12.73,42.69 12.64,42.79 IR13.P$2 13.78,42.69 | 13.78,42.69 15.69,42.69 U$6.P$2 15.78,42.69 20.74,47.64 20.74,50.31 | 14.55,24.12 14.93,24.12 U$16.P$2 15.02,24.12 15.21,24.12 16.64,22.69 16.64,20.21 19.97,16.88 19.97,16.21 U$18.P$2 | 14.55,24.12 12.64,22.21 IR11.P$2 | J2.S2 5.4,29.36 5.21,29.36 4.45,28.59 1.69,28.59 1.49,28.78 1.49,36.21 1.69,36.4 4.64,36.4 5.4,35.64 J2.S1 5.5,35.55 5.69,35.36 5.69,33.83 J2.5 5.78,33.74 9.21,33.74 10.45,32.5 IR12.P$2 10.54,32.5 11.5,33.45 13.31,33.45 U$14.P$2 | 14.55,24.12 14.55,32.31 13.4,33.45 U$14.P$2 | 13.78,42.69 13.78,33.93 13.4,33.55 U$14.P$2
  Bottom 0.127: 46.55,36.6 47.6,35.55 47.6,35.07 Y2.2 | 46.55,36.6 45.12,38.02 U1.32 | 57.98,30.59 62.46,30.59 64.36,32.5 IR4.P$2 64.55,32.5 66.08,34.02 66.08,39.36 62.65,42.79 62.46,42.79 IR3.P$2 | 57.98,30.59 56.93,30.59 X1.2 | 46.55,36.6 49.75,39.8 52.59,39.8 53.88,38.5 56.64,38.5 57.98,37.17 57.98,30.59 | 33.12,41.45 33.12,36.31 32.45,35.64 U1.62 | 33.12,41.45 30.83,43.74 30.17,43.74 29.59,44.31 | 40.64,45.93 36.17,41.45 33.12,41.45 | 40.64,45.93 42.17,47.45 U1.11 | 29.59,44.31 29.02,44.88 29.02,45.26 35.12,51.36 35.31,51.36 35.88,50.79 U1.99 | 29.59,44.31 U1.81 | v40.07,46.5 40.64,45.93 | U$7.P$3 16.26,29.55 16.26,25.83 12.64,22.21 IR11.P$2 | U$9.P$1 21.97,38.79 21.97,37.74 17.12,32.88 10.93,32.88 10.54,32.5 IR12.P$2 | IR15.P$2 27.12,57.46 24.93,57.46 24.83,57.55 23.02,57.55 18.45,52.98 18.45,51.64 IR14.P$2
  pour Top: 22.26,66.79 -5.68,38.85 -5.68,31.23 -5.68,27.42 24.8,-3.06 51.47,-3.06 75.6,21.07 75.6,42.66 52.74,65.52 51.47,66.79
  pour Bottom: -4.41,65.52 -3.14,64.25 -3.14,12.18 10.83,-1.79 56.55,-1.79 75.6,17.26 75.6,24.88 75.6,46.47 54.01,68.06 -1.87,68.06
MISO  (via drill 0.35)
  Top 0.127: v47.12,44.6 47.12,44.98 v48.55,46.41 | v42.55,20.88 36.93,20.88 35.5,19.45 U$59.P$5
  Bottom 0.127: v47.12,44.6 46.17,43.64 U1.22 | v48.55,46.41 52.17,46.41 52.36,46.6 62.17,46.6 67.6,41.17 67.6,30.79 63.22,26.4 57.22,26.4 51.69,20.88 v42.55,20.88
MOSI  (via drill 0.35)
  Top 0.127: v39.98,41.74 39.98,41.36 39.59,40.98 v39.59,38.4 | v39.02,28.31 v39.02,34.02
  Bottom 0.127: v39.98,41.74 43.5,41.74 45.69,43.93 U1.21 | v39.59,38.4 39.59,37.07 39.02,36.5 v39.02,34.02 | v39.02,28.31 39.02,20.97 37.5,19.45 U$59.P$4
N$1
  Top 0.127: U$39.P$2 24.74,35.93 24.74,38.4 21.5,41.64 21.5,42.22 22.74,43.45 23.78,43.45 24.83,44.5 24.83,46.69 25.31,47.17 25.31,48.22 28.16,51.07 29.88,51.07 LED3.A
N$2
  Top 0.127: U$40.P$2 28.16,35.93 28.16,42.22 34.26,48.31 34.26,49.55 LED4.A
N$3
  Top 0.127: U$41.P$2 31.69,35.93 31.69,39.36 35.79,43.45 35.79,45.17 LED5.A
N$4
  Top 0.127: U$42.P$2 34.93,35.93 34.93,40.12 34.36,40.69 LED6.A
N$5
  Top 0.127: LED7.A 29.88,30.12 28.74,28.98 27.4,28.98 26.83,29.55 24.83,29.55 U$43.P$2
N$6
  Top 0.127: U$44.P$2 28.07,29.64 28.07,32.88 25.69,35.26 25.69,40.5 25.5,40.69 LED8.A
N$7
  Top 0.127: U$47.P$2 31.5,29.55 29.88,29.55 28.93,28.59 24.55,28.59 20.26,32.88 20.26,41.55 22.55,43.83 23.02,43.83 23.88,44.69 23.88,45.17 LED9.A
N$9
  Top 0.127: U$58.P$2 21.88,19.83 25.12,19.83 LED2.A
N$10
  Top 0.127: U$57.P$2 21.88,23.64 25.12,23.64 LED1.A
N$11  (via drill 0.35)
  Top 0.127: LED7.K 29.88,41.07 32.17,41.07 33.02,41.93 LED6.K 33.12,42.02 34.07,42.98 34.07,45.17 LED5.K 34.17,45.26 34.17,47.64 35.41,48.88 35.41,49.74 34.36,50.79 34.17,50.79 33.12,49.74 | LED8.K 26.64,42.02 26.64,44.22 25.69,45.17 LED9.K 25.69,45.26 25.69,47.36 26.64,48.31 LED10.K 26.74,48.41 27.69,49.36 29.88,49.36 | 29.88,49.36 30.83,48.41 33.02,48.41 LED4.K 33.12,48.41 33.12,49.74 | 29.88,49.36 LED3.K | LED14.K 48.36,42.02 48.36,44.22 49.31,45.17 LED13.K 49.31,45.26 49.31,47.36 48.36,48.31 LED12.K 48.26,48.41 46.07,48.41 45.12,49.36 | LED15.K 45.12,41.07 44.26,41.93 41.98,41.93 LED16.K 41.88,42.02 41.88,44.22 40.93,45.17 LED17.K 40.93,45.26 40.93,47.36 41.88,48.31 LED18.K 41.98,48.41 42.64,49.07 | 45.12,49.36 42.93,49.36 42.64,49.07 | 45.12,49.36 LED11.K | 42.64,49.07 38.83,52.88 37.69,52.88 U$5.P$3 | 33.12,49.74 32.45,50.41 32.36,50.41 v31.59,51.17
  Bottom 0.127: v31.59,51.17 33.21,52.79 37.5,52.79 37.59,52.88 U$5.P$3
N$12
  Bottom 0.127: U$8.P$1 16.55,38.79 16.55,38.21 14.35,36.02 14.35,35.64 U$7.P$6
N$16  (via drill 0.35)
  Top 0.127: v8.07,32.02 7.69,32.02 7.4,31.74 5.88,31.74 5.78,31.83 J2.2
  Bottom 0.127: v8.07,32.02 8.07,26.5 11.12,23.45 12.73,23.45 13.78,24.5 13.78,25.17 13.69,25.26 13.69,30.4 13.88,30.59 16.73,30.59 17.31,30.02 17.31,29.64 U$7.P$2
N$17  (via drill 0.35)
  Top 0.127: J2.3 v7.11,32.5
  Bottom 0.127: v7.11,32.5 7.11,26.12 12.16,21.07 13.59,21.07 18.26,25.74 18.26,29.55 U$7.P$1
N$18
  Bottom 0.127: U$9.P$2 19.97,38.79 19.97,37.26 18.36,35.64 U$7.P$10
N$22
  Top 0.127: U$48.P$2 34.93,29.64 34.93,30.02 34.64,30.31 34.64,30.98 37.31,33.64 37.31,49.36 34.64,52.03 27.88,52.03 25.5,49.64 LED10.A
N$24
  Top 0.127: U$49.P$2 54.07,29.64 54.07,31.83 55.6,33.36 55.6,40.02 53.88,41.74 53.88,46.5 49.31,51.07 45.12,51.07 LED11.A
N$25
  Top 0.127: U$50.P$2 49.5,29.64 51.31,29.64 55.22,33.55 55.22,39.83 53.5,41.55 53.5,45.64 49.6,49.55 LED12.A
N$26  (via drill 0.35)
  Top 0.127: U$51.P$2 49.02,32.98 52.45,32.98 53.03,33.55 54.64,33.55 54.84,33.74 54.84,36.4 54.64,36.6 50.74,36.6 47.22,40.12 42.55,40.12 40.83,41.83 v40.83,44.02 | v42.26,45.45 46.55,45.45 v47.5,46.41 | v50.07,47.17 50.07,46.22 51.02,45.26 LED13.A
  Bottom 0.127: v42.26,45.45 v40.83,44.02 | v47.5,46.41 48.26,47.17 v50.07,47.17
N$27  (via drill 0.35)
  Top 0.152: LED14.A 51.14,39.18 | 51.14,39.18 | 51.14,39.18 51.17,39.14 v51.17,38.86 | U$52.P$2 43.26,31.53 43.26,31.97 43.68,32.38 44.73,32.38 v45.42,31.7
  Bottom 0.152: v51.17,38.86 51.17,38.32 50.46,37.6 50.46,35.3 46.39,31.23 45.89,31.23 v45.42,31.7
N$28
  Top 0.127: U$53.P$2 50.84,35.93 47.6,39.17 45.12,39.17 LED15.A
N$29
  Top 0.127: U$54.P$2 46.93,35.93 44.55,38.31 43.12,38.31 40.74,40.69 LED16.A
N$30
  Top 0.127: U$55.P$2 44.74,35.93 42.93,37.74 39.98,37.74 39.88,37.64 39.31,37.64 38.83,38.12 38.83,44.88 39.12,45.17 LED17.A
N$31  (via drill 0.35)
  Top 0.127: U$56.P$2 41.12,35.93 40.07,36.98 39.5,36.98 37.69,35.17 37.69,32.88 v35.41,30.59 | v30.36,27.36 28.93,27.36 28.64,27.07 24.26,27.07 16.64,34.69 16.64,39.55 v24.55,47.45 | v36.36,53.55 36.36,52.69 39.41,49.64 40.64,49.64 LED18.A
  Bottom 0.127: v35.41,30.59 34.93,30.59 31.69,27.36 v30.36,27.36 | v24.55,47.45 25.02,47.45 34.74,57.17 35.5,57.17 36.64,56.03 36.64,53.84 v36.36,53.55
N$37
  Top 0.127: U$60.P$1 53.6,19.83 53.6,22.31 LED19.K
N$46  (via drill 0.35)
  Top 0.127: v36.55,47.93 36.55,48.98 U$1.P$1
  Bottom 0.127: v36.55,47.93 36.55,49.45 35.69,50.31 U1.98
RES  (via drill 0.35)
  Top 0.127: S1.1 47.88,17.74 47.88,21.83 S1.2 47.79,21.93 47.5,22.21 v47.5,23.07 40.26,23.07 38.45,24.88 U$10.P$1 37.88,24.88 33.4,20.4 32.45,20.4 31.5,19.45 U$59.P$7 | v58.07,29.64 v58.07,38.79 | v21.02,38.98 21.02,33.17 v23.78,30.4
  Bottom 0.127: v58.07,38.79 56.55,40.31 49.69,40.31 47.6,38.21 46.36,38.21 45.79,38.79 U1.30 | v58.07,29.64 58.07,27.83 53.31,23.07 v47.5,23.07 | v21.02,38.98 20.36,39.64 19.59,39.64 18.83,38.88 18.64,38.88 U$8.P$2 | v23.78,30.4 23.78,27.07 31.4,19.45 U$59.P$7
RST  (via drill 0.35)
  Top 0.127: v41.69,28.69 45.98,28.69 46.74,29.45 46.74,30.12 49.22,32.59 v53.12,32.59
  Bottom 0.127: v41.69,28.69 38.74,31.64 U1.50 | v53.12,32.59 56.93,36.4 X1.5
RX0  (via drill 0.35)
  Top 0.127: v33.31,43.45 v31.69,41.83
  Bottom 0.127: v31.69,41.83 31.5,41.64 27.02,41.64 26.55,41.17 19.69,41.17 17.88,39.36 17.88,38.98 16.36,37.45 16.36,35.64 U$7.P$8 | v33.31,43.45 34.17,43.45 38.45,47.74 38.45,50.12 U1.2
RX1  (via drill 0.35)
  Top 0.127: v51.31,30.69 v48.93,30.69
  Bottom 0.127: v48.93,30.69 43.22,30.69 40.45,33.45 U1.45 | v51.31,30.69 52.84,30.69 56.55,34.4 56.93,34.4 X1.4
SCK  (via drill 0.35)
  Top 0.127: v36.55,40.02 36.55,35.74 36.93,35.36 36.93,33.83 34.07,30.98 34.07,29.17 34.83,28.4 35.59,28.4 35.79,28.21 35.79,26.21 v32.36,22.78
  Bottom 0.127: v36.55,40.02 39.02,42.5 43.6,42.5 45.41,44.31 U1.20 | v32.36,22.78 32.36,20.5 33.4,19.45 U$59.P$6
SS  (via drill 0.35)
  Top 0.127: v52.74,44.02 v51.12,44.02 | v55.31,41.45 55.31,40.88 56.36,39.83 v56.36,37.74 | v51.12,31.74 48.93,31.74 47.12,29.93 47.12,27.36 v43.6,23.83
  Bottom 0.127: v51.12,44.02 49.79,45.36 45.69,45.36 45.12,44.79 U1.19 | v55.31,41.45 v52.74,44.02 | v56.36,37.74 56.36,37.36 51.12,32.12 v51.12,31.74 | v43.6,23.83 43.6,23.55 39.5,19.45 U$59.P$3
TX0  (via drill 0.35)
  Top 0.127: v17.4,37.45 17.4,39.26 v22.74,44.6
  Bottom 0.127: v17.4,37.45 17.4,35.64 U$7.P$9 | v22.74,44.6 23.21,44.6 28.64,50.03 32.64,50.03 34.74,52.12 36.93,52.12 37.21,51.84 38.74,51.84 38.93,52.03 39.21,52.03 39.98,51.26 39.98,50.98 39.41,50.41 U1.3
TX1
  Bottom 0.127: X1.3 55.22,32.5 50.64,27.93 45.31,27.93 40.17,33.07 U1.46
XT1
  Bottom 0.127: U1.34 44.36,37.36 46.07,35.64 46.07,34.88 46.74,34.21 Y2.1
XT2
  Bottom 0.127: U1.33 44.74,37.64 46.45,35.93 46.45,35.45 48.07,33.83 48.26,33.83 48.84,34.4 48.84,35.55 48.55,35.83 Y2.3

## Text on the board
tPlace: 0 | 1 | 15 | 2 | ON | OFF | 14 | LED_SW | 3 | 13 | CAM | 4 | 12 | 5 | toMAIN | 11 | _ | 9 | 10 | _ | 7 | 9 | 8